# Altium PCB MBLv1.PcbDoc
Units mm, origin at the board's own origin, x right, y up, seen from the top; angles counter-clockwise.
Board outline 195 x 55 mm, 2 copper layers (Top Layer, Bottom Layer), stack 1.521 mm thick; 110 components, 72 nets, 351 pads, 167 vias.
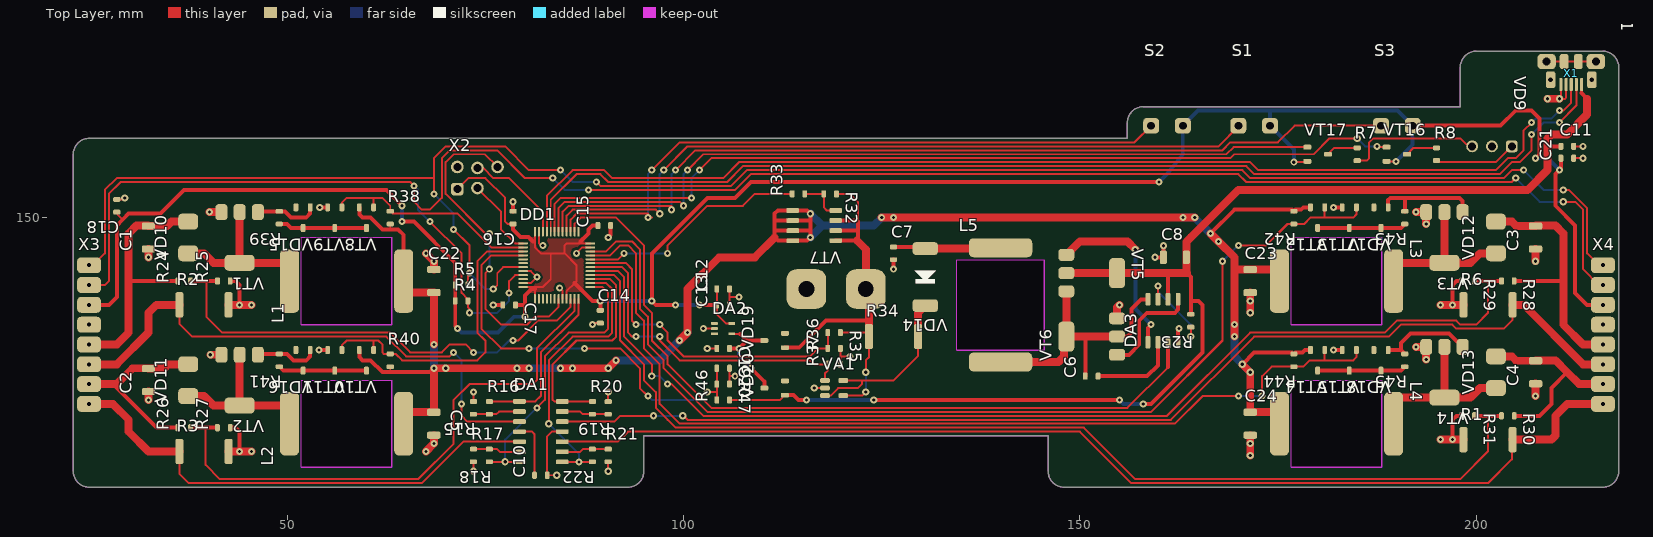
[diagram p0: Top Layer view]
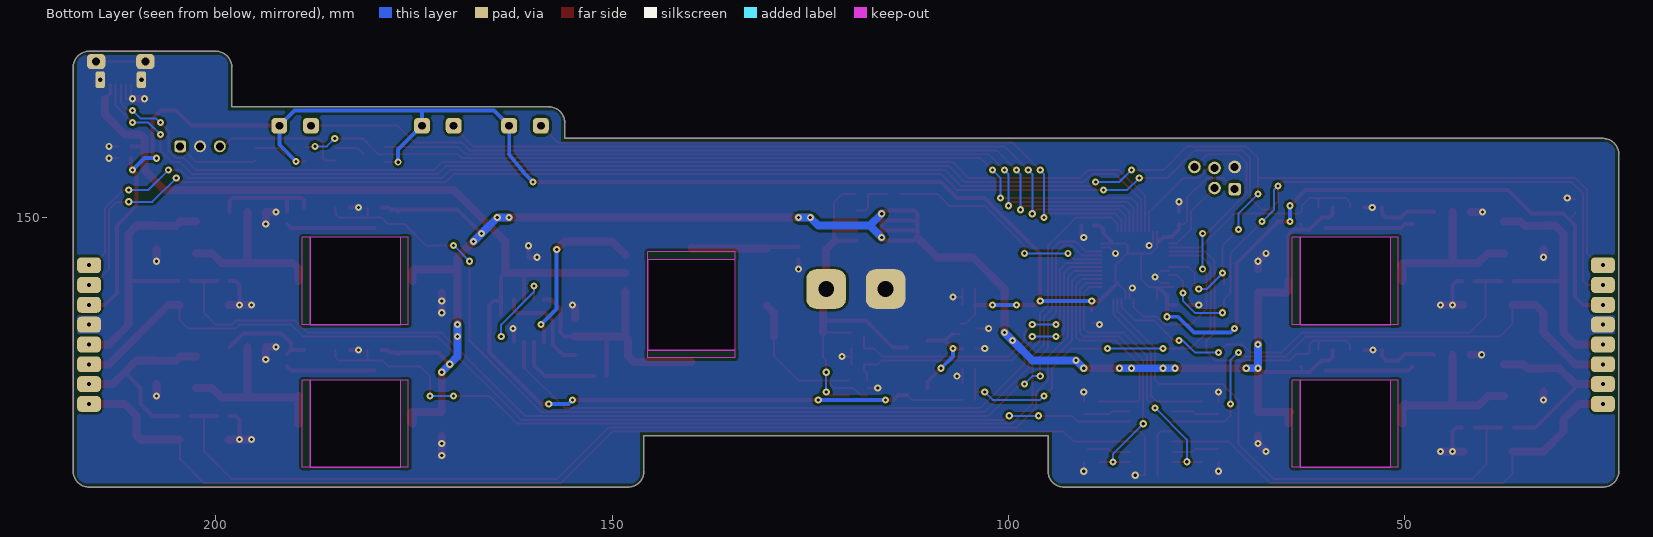
[diagram p1: Bottom Layer view, seen from below]
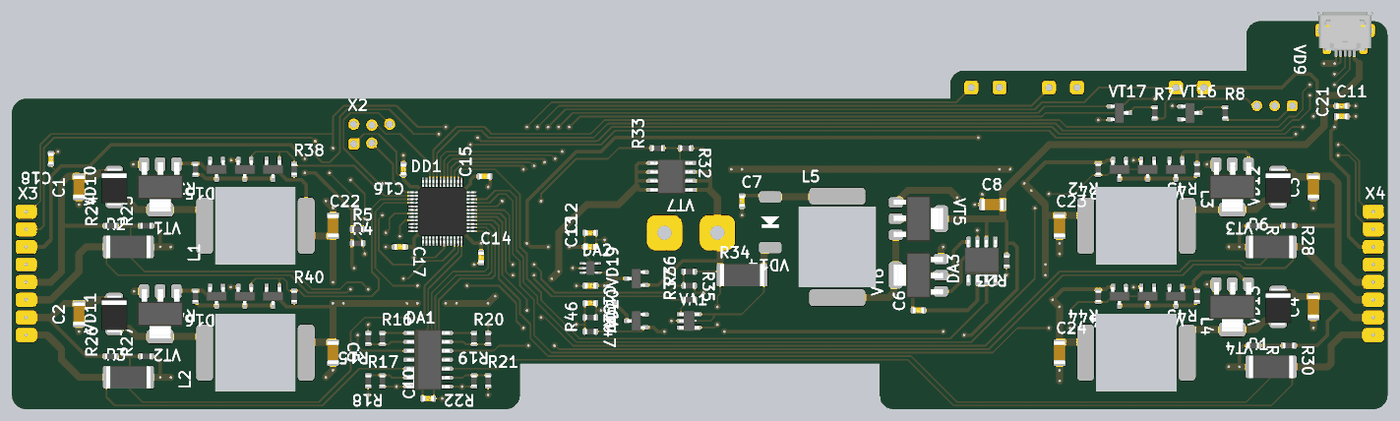
[diagram p2: 3D render of the assembled board from above, using the file's embedded part models]

## Layer stack, top to bottom
Top Solder: solder mask 0.0102, Solder Resist, Dk 3.5
Top Layer: signal copper 0.0356
Dielectric 1: dielectric 1.45, FR-4, Dk 4.8
Bottom Layer: signal copper 0.0356
Bottom Solder: solder mask 0.0102, Solder Resist, Dk 3.5

## Board outline
25,116 cw(c25,118) 23,118 23,158 cw(c25,158) 25,160 156,160 156,162 cw(c158,162) 158,164 198,164 198,169 cw(c200,169) 200,171 216,171 cw(c216,169) 218,169 218,118 cw(c216,118) 216,116 148,116 cw(c148,118) 146,118 146,122.5 95,122.5 95,118 cw(c93,118) 93,116

## Design rules (kind name [scope] priority, off if disabled: settings)
Clearance Clearance_Mid2_to_edge [OnLayer('Mid-Layer 2') vs OnLayer('Keep-Out Layer')] p1: gap=0.5
Clearance Clearance_Mid1_to_edge [OnLayer('Mid-Layer 1') vs OnLayer('Keep-Out Layer')] p2: gap=0.5
Clearance Clearance_Top_to_edge [OnLayer('Top Layer') vs OnLayer('Keep-Out Layer')] p3: gap=0.25
Clearance Clearance_Bottom_to_edge [OnLayer('Bottom Layer') vs OnLayer('Keep-Out Layer')] p4: gap=0.25
Clearance ClearancePoly [InPolygon] p5: gap=0.3
Clearance [All] p6: gap=0.25
FabricationTestPointUsage TestPointUsage [All] p1: valid=0 allowmultiple=FALSE
FabricationTestpoint Testpoint [All] p1: side=3 testpointundercomponent=TRUE minsize=1.016 maxsize=2.54 preferedsize=1.524 minholesize=0 maxholesize=1.016 preferedholesize=0.813 testpointgrid=0.025 allowsidetop=TRUE allowsidebottom=TRUE usegrid=TRUE gridtolerance=0
PolygonConnect [All] p1: connectstyle=Direct reliefconductorwidth=0.25 reliefentries=4 polygonreliefangle="45 Angle" airgapwidth=0.4
RoutingVias [All] p1: holewidth=0.5 width=1 viastyle="Through Hole" minholewidth=0.3 minwidth=0.8 maxholewidth=1 maxwidth=1.5
SilkToSolderMaskClearance SilkscreenOverComponentPads [IsPad] p1: minsilkscreentomaskgap=0.254 clearancetoexposedcopper=TRUE
SolderMaskExpansion [All] p1: expansion=0.102
Width [All] p1: maxlimit=3 minlimit=0.25 preferedwidth=0.5 minimp=50.000000 maximp=50.000000 favimp=50.000000
26 further rules are at their usual default settings.

## Components (designator, comment, footprint, x,y, rotation, side; value= is the part's Value field where it differs from the comment)
C1 "CC1206KKX7R6BB226" CAPACITORSMD1206(REFLOW) 32.5,147.5 r90 top
C2 "CC1206KKX7R6BB226" CAPACITORSMD1206(REFLOW) 32.5,129.5 r90 top
C3 "CC1206KKX7R6BB226" CAPACITORSMD1206(REFLOW) 207.5,147.5 r90 top
C4 "CC1206KKX7R6BB226" CAPACITORSMD1206(REFLOW) 207.5,130.5 r90 top
C5 "CC1206KKX7R6BB226" CAPACITORSMD1206(REFLOW) 68.5,124 r270 top
C6 "CC0603KRX7R7BB224" CAPACITORSMD0603(MANUAL) 151.5,130 r180 top
C7 "CC0603KRX7R7BB224" CAPACITORSMD0603(MANUAL) 126.5,145.5 r90 top
C8 "CC1206KKX7R6BB226" CAPACITORSMD1206(REFLOW) 162,145 r0 top
C10 "CC0603KRX7R7BB104" CAPACITORSMD0603(MANUAL) 82,117.5 r180 top
C11 "CC0603KRX7R7BB104" CAPACITORSMD0603(MANUAL) 211.5,159 r180 top
C12 "CC0603KRX7R7BB224" CAPACITORSMD0603(MANUAL) 105,141 r180 top
C13 "CC0603KRX7R7BB224" CAPACITORSMD0603(MANUAL) 105,139 r180 top
C14 "CC0603KRX7R7BB104" CAPACITORSMD0603(MANUAL) 89.5,137.5 r90 top
C15 "CC0603KRX7R7BB104" CAPACITORSMD0603(MANUAL) 90,149 r180 top
C16 "CC0603KRX7R7BB104" CAPACITORSMD0603(MANUAL) 78.5,150 r270 top
C17 "CC0603KRX7R7BB104" CAPACITORSMD0603(MANUAL) 78,139 r0 top
C18 "CC0603KRX7R7BB104" CAPACITORSMD0603(MANUAL) 28.5,151.5 r270 top
C19 "CC0603KRX7R7BB104" CAPACITORSMD0603(MANUAL) 105,133.5 r0 top
C20 "CC0603KRX7R7BB104" CAPACITORSMD0603(MANUAL) 105,131 r0 top
C21 "CC0603KRX7R7BB104" CAPACITORSMD0603(MANUAL) 211.5,157.5 r180 top
C22 "CC1206KKX7R6BB226" CAPACITORSMD1206(REFLOW) 68.5,142 r90 top
C23 "CC1206KKX7R6BB226" CAPACITORSMD1206(REFLOW) 171.5,142 r270 top
C24 "CC1206KKX7R6BB226" CAPACITORSMD1206(REFLOW) 171.5,124 r270 top
DA1 "LMV324IDR" SO14 82,123 r0 top
DA2 "TPS71533DCKR" SOT323-5 105,136 r270 top
DA3 "TPS28225D" SO8 160.5,137 r90 top
DD1 "STM32L052C6T" LQFP48_STM32 84,144 r0 top
L1 "IHLP4040DZER101M" IHLP-4040DZ(manual/deep1.5mm) 57.5,142 r180 top
L2 "IHLP4040DZER101M" IHLP-4040DZ(manual/deep1.5mm) 57.5,124 r180 top
L3 "IHLP4040DZER101M" IHLP-4040DZ(manual/deep1.5mm) 182.4,142 r0 top
L4 "IHLP4040DZER101M" IHLP-4040DZ(manual/deep1.5mm) 182.4,124 r0 top
L5 "IHLP4040DZER101M" IHLP-4040DZ(manual/deep1.5mm) 140,139 r90 top
R1 "CRA2512-FZ-R100ELF" RESISTORSMD2512(REFLOW) 201.5,122 r0 top
R2 "CRA2512-FZ-R100ELF" RESISTORSMD2512(REFLOW) 39.5,139 r180 top
R3 "CRA2512-FZ-R100ELF" RESISTORSMD2512(REFLOW) 39.5,120.5 r180 top
R4 "RC0603FR-074K7" RESISTORSMD0603(MANUAL) 72,139.5 r0 top
R5 "RC0603FR-074K7" RESISTORSMD0603(MANUAL) 72,141.5 r0 top
R6 "CRA2512-FZ-R100ELF" RESISTORSMD2512(REFLOW) 201.5,139 r0 top
R7 "RC0603FR-07100R" RESISTORSMD0603(MANUAL) 185,158 r270 top
R8 "RC0603FR-07100R" RESISTORSMD0603(MANUAL) 195,158 r270 top
R15 "RC0603FR-074K7" RESISTORSMD0603(MANUAL) 73.5,126 r270 top
R16 "RC0603FR-07220K" RESISTORSMD0603(MANUAL) 75.5,126 r90 top
R17 "RC0603FR-074K7" RESISTORSMD0603(MANUAL) 73.5,120 r90 top
R18 "RC0603FR-07220K" RESISTORSMD0603(MANUAL) 75.5,120 r270 top
R19 "RC0603FR-074K7" RESISTORSMD0603(MANUAL) 90.5,126 r270 top
R20 "RC0603FR-07220K" RESISTORSMD0603(MANUAL) 88.5,126 r90 top
R21 "RC0603FR-074K7" RESISTORSMD0603(MANUAL) 90.5,120 r90 top
R22 "RC0603FR-07220K" RESISTORSMD0603(MANUAL) 88.5,120 r270 top
R23 "RC0603FR-07220K" RESISTORSMD0603(MANUAL) 164,137 r270 top
R24 "RC0603FR-07470K" RESISTORSMD0603(MANUAL) 37,142 r180 top
R25 "RC0603FR-07100K" RESISTORSMD0603(MANUAL) 42,142 r180 top
R26 "RC0603FR-07470K" RESISTORSMD0603(MANUAL) 37,123.5 r180 top
R27 "RC0603FR-07100K" RESISTORSMD0603(MANUAL) 42,123.5 r180 top
R28 "RC0603FR-07470K" RESISTORSMD0603(MANUAL) 204,142 r0 top
R29 "RC0603FR-07100K" RESISTORSMD0603(MANUAL) 199,142 r0 top
R30 "RC0603FR-07470K" RESISTORSMD0603(MANUAL) 204,125 r0 top
R31 "RC0603FR-07100K" RESISTORSMD0603(MANUAL) 199,125 r0 top
R32 "RC0603FR-07100K" RESISTORSMD0603(MANUAL) 118.5,153 r0 top
R33 "RC0603FR-074K7" RESISTORSMD0603(MANUAL) 114.5,153 r180 top
R34 "CRA2512-FZ-R010ELF" RESISTORSMD2512(REFLOW) 126.5,135 r0 top
R35 "RC0603FR-07220K" RESISTORSMD0603(MANUAL) 119,135.5 r0 top
R36 "RC0603FR-07220K" RESISTORSMD0603(MANUAL) 119,133.5 r180 top
R37 "RC0603FR-07470K" RESISTORSMD0603(MANUAL) 119,131.5 r180 top
R38 "RC0603FR-0747K" RESISTORSMD0603(MANUAL) 63,150 r90 top
R39 "RC0603FR-075R1" RESISTORSMD0603(MANUAL) 49,150 r270 top
R40 "RC0603FR-0747K" RESISTORSMD0603(MANUAL) 63,132 r90 top
R41 "RC0603FR-075R1" RESISTORSMD0603(MANUAL) 49,132 r270 top
R42 "RC0603FR-0747K" RESISTORSMD0603(MANUAL) 177,150 r270 top
R43 "RC0603FR-075R1" RESISTORSMD0603(MANUAL) 191,150 r270 top
R44 "RC0603FR-0747K" RESISTORSMD0603(MANUAL) 177,132 r270 top
R45 "RC0603FR-075R1" RESISTORSMD0603(MANUAL) 191,132 r270 top
R46 "RC0603FR-07220K" RESISTORSMD0603(MANUAL) 105,127 r180 top
R47 "RC0603FR-07100K" RESISTORSMD0603(MANUAL) 105,129 r0 top
S1 "TC-3121" "TC-3121(RIGHT-ANGLE VAR1)" 172,164.6 r90 top
S2 "TC-3121" "TC-3121(RIGHT-ANGLE VAR1)" 161,164.6 r90 top
S3 "TC-3121" "TC-3121(RIGHT-ANGLE VAR1)" 190,164.6 r90 top
VA1 "INA138NA" SOT23-5 119,128.5 r0 top
VD9 "L-119EGWT" L-119EGWT(rightAngleVar1) 202,166 r270 top
VD10 "10BQ040" SMB_10BQ40 37.5,147.5 r90 top
VD11 "10BQ040" SMB_10BQ40 37.5,129.5 r90 top
VD12 "10BQ040" SMB_10BQ40 202.5,147.5 r90 top
VD13 "10BQ040" SMB_10BQ40 202.5,130.5 r90 top
VD14 "30BQ040" SMC 130.5,142.5 r270 top
VD15 "BAT54" SOT23 52,150 r180 top
VD16 "BAT54" SOT23 52,132 r180 top
VD17 "BAT54" SOT23 188,150 r180 top
VD18 "BAT54" SOT23 188,132 r180 top
VD19 "BAT54" SOT23 111.5,134.5 r90 top
VD20 "BAT54" SOT23 111.5,128.5 r90 top
VT1 "IRLL2705" SOT223 44,147.5 r180 top
VT2 "IRLL2705" SOT223 44,129.5 r180 top
VT3 "IRLL2705" SOT223 196,147.5 r180 top
VT4 "IRLL2705" SOT223 196,130.5 r180 top
VT5 "IRLL2705" SOT223 151.5,143 r270 top
VT6 "IRLL2705" SOT223 151.5,135 r90 top
VT7 "IRF7410" SO8 116.5,149 r180 top
VT8 "IRLML6402" SOT23 60,150 r180 top
VT9 "IRLML2402" SOT23 56,150 r180 top
VT10 "IRLML6402" SOT23 60,132 r180 top
VT11 "IRLML2402" SOT23 56,132 r180 top
VT12 "IRLML6402" SOT23 180,150 r180 top
VT13 "IRLML2402" SOT23 184,150 r180 top
VT14 "IRLML6402" SOT23 180,132 r180 top
VT15 "IRLML2402" SOT23 184,132 r180 top
VT16 "PDTA143ET" SOT23 190,158 r270 top
VT17 "PDTA143ET" SOT23 180,158 r270 top
X1 "MOLEX 47346-0001" "MOLEX 47346-0001" 212,166.8 r270 top
X2 "PLD-6-SWD" PLD-6-SWD 74,155 r0 top
X3 "ConnectorMainSide" ConnectorMainSide 25,144 r0 top
X4 "ConnectorMainSide" ConnectorMainSide 216,144 r0 top

## Footprints (in the part's own frame and the unit in brackets; to place one, negate y for a bottom-side part, rotate by r counter-clockwise, add the part's x,y. Pads: shape width x height; smd on the part's side, far side on the other; paste and mask are expansions set on the pad)
CAPACITORSMD0603(MANUAL) [mm]
  rrect50% 0.6x0.9 smd: 1(-0.8,0) 2(0.8,0)
  body extent -0.8,-0.4 0.8,0.4, height 0.3
CAPACITORSMD1206(REFLOW) [mm]
  rrect50% 0.9x1.7 smd: 1(-1.45,0) 2(1.45,0)
  body extent -1.6,-0.8 1.6,0.8, height 1
ConnectorMainSide [mm]
  rrect50% 3x2 hole 0.5: 1(0,0) 2(0,-2.5) 3(0,-5) 4(0,-7.5) 5(0,-10) 6(0,-12.5) 7(0,-15) 8(0,-17.5)
IHLP-4040DZ(manual/deep1.5mm) [mm]
  rrect50% 2.4x8 smd: 1(-7.2,0) 2(7.2,0)
  Bottom Layer keep-out lines w0.1: 6.7,5.5 5.7,5.5 5.7,-5.5 6.7,-5.5 6.7,5.5 ; -5.7,5.5 -5.7,-5.5 -6.7,-5.5 -6.7,5.5 -5.7,5.5
  Keep-Out Layer board cut-out: -5.7,5.5 5.7,5.5 5.7,-5.5 -5.7,-5.5
  Keep-Out Layer lines w0.1: 5.7,5.5 5.7,-5.5 -5.7,-5.5 -5.7,5.5 5.7,5.5
  body extent -5.7,-5.2 5.7,5.2, height 2.5
L-119EGWT(rightAngleVar1) [mm]
  rrect50% 1.5x1.5 hole 1: 1(7,2.5)
  round 1.5 hole 1: 2(7,0) 3(7,-2.5)
  body extent -7,-2.75 7.25,2.75, height 2
LQFP48_STM32 [mm]
  rrect50% 0.25x1.2 smd: 1(-2.75,-4.25) 2(-2.25,-4.25) 3(-1.75,-4.25) 4(-1.25,-4.25) 5(-0.75,-4.25) 6(-0.25,-4.25) 7(0.25,-4.25) 8(0.75,-4.25) 9(1.25,-4.25) 10(1.75,-4.25) 11(2.25,-4.25) 12(2.75,-4.25) 25(2.75,4.25) 26(2.25,4.25) 27(1.75,4.25) 28(1.25,4.25) 29(0.75,4.25) 30(0.25,4.25) 31(-0.25,4.25) 32(-0.75,4.25) 33(-1.25,4.25) 34(-1.75,4.25) 35(-2.25,4.25) 36(-2.75,4.25)
  rrect50% 1.2x0.25 smd: 13(4.25,-2.75) 14(4.25,-2.25) 15(4.25,-1.75) 16(4.25,-1.25) 17(4.25,-0.75) 18(4.25,-0.25) 19(4.25,0.25) 20(4.25,0.75) 21(4.25,1.25) 22(4.25,1.75) 23(4.25,2.25) 24(4.25,2.75) 37(-4.25,2.75) 38(-4.25,2.25) 39(-4.25,1.75) 40(-4.25,1.25) 41(-4.25,0.75) 42(-4.25,0.25) 43(-4.25,-0.25) 44(-4.25,-0.75) 45(-4.25,-1.25) 46(-4.25,-1.75) 47(-4.25,-2.25) 48(-4.25,-2.75)
  body extent -4.5,-4.5 4.5,4.5, height 1.6
"MOLEX 47346-0001" [mm]
  rrect50% 1.6x0.4 smd: 1(0,1.3) 2(0,0.65) 3(0,0) 4(0,-0.65) 5(0,-1.3)
  rrect50% 1.9x2.3 hole 1: 6(-2.9,3.1) 6(-2.9,-3.1)
  rrect50% 1.9x1.1 smd: 6(-2.9,-0.9) 6(-2.9,0.9)
  rrect50% 2.1x1.2 hole 0.6: 6(-0.6,2.6) 6(-0.6,-2.6)
  body extent -5.48,-3.99 -0.05,3.99, height 2.77
PLD-6-SWD [mm]
  rrect50% 1.6x1.6 hole 1: 1(-2.54,-1.397)
  round 1.6 hole 1: 2(-2.54,1.397) 3(0,-1.27) 4(0,1.27) 6(2.54,1.397)
RESISTORSMD0603(MANUAL) [mm]
  rrect50% 0.6x0.9 smd: 1(-0.8,0) 2(0.8,0)
  body extent -0.8,-0.4 0.8,0.4, height 0.5
RESISTORSMD2512(REFLOW) [mm]
  rrect50% 1x3.2 smd: 1(-3.1,0) 2(3.1,0)
  body extent -3.15,-1.6 3.15,1.6, height 0.65
SMB_10BQ40 [mm]
  rrect50% 2x2.5 smd: 1(-2,0) 2(2,0)
  body extent -2.65,-1.85 2.65,1.85, height 2.2
SMC [mm]
  rrect50% 1.6x3.2 smd: 1(-3.6,0) 2(3.6,0)
  silkscreen extent -0.8,-1.3 0.8,1.3, body extent -4,-3 4,3, height 2.7
SO8 [mm]
  rrect50% 1.6x0.6 smd: 1(-2.7,1.905) 2(-2.7,0.635) 3(-2.7,-0.635) 4(-2.7,-1.905) 5(2.7,-1.905) 6(2.7,-0.635) 7(2.7,0.635) 8(2.7,1.905)
  body extent -3,-2.45 3,2.45, height 1.63
SO14 [mm]
  rrect50% 1.6x0.6 smd: 1(-2.7,3.81) 2(-2.7,2.54) 3(-2.7,1.27) 4(-2.7,0) 5(-2.7,-1.27) 6(-2.7,-2.54) 7(-2.7,-3.81) 8(2.7,-3.81) 9(2.7,-2.54) 10(2.7,-1.27) 11(2.7,0) 12(2.7,1.27) 13(2.7,2.54) 14(2.7,3.81)
  body extent -3.01,-4.32 3.01,4.33, height 1.75
SOT23 [mm]
  rrect50% 0.6x1 smd: 1(-0.9,-1.3) 2(0.9,-1.3) 3(0,1.3)
  body extent -1.46,-1.26 1.46,1.26, height 0.97
SOT23-5 [mm]
  rrect50% 1.2x0.6 smd: 1(-1.15,0.95) 2(-1.15,0) 3(-1.15,-0.95) 4(1.15,-0.95) 5(1.15,0.95)
  body extent -1.4,-1.45 1.4,1.45, height 1.2
SOT223 [mm]
  rrect50% 1.5x2 smd: 1(-2.3,-3.2) 2(0,-3.2) 3(2.3,-3.2)
  rrect50% 3.8x2 smd: 2(0,3.2)
  body extent -3.25,-3.5 3.25,3.5, height 1.68
SOT323-5 [mm]
  rrect50% 0.35x0.85 smd: 1(-0.65,-1.1) 2(0,-1.1) 3(0.65,-1.1) 4(0.65,1.1) 5(-0.65,1.1)
  body extent -1,-1.05 1,1.05, height 1
"TC-3121(RIGHT-ANGLE VAR1)" [mm]
  rrect50% 2x2 hole 1: 1(-3,2) 2(-3,-2)
  body extent -3,-3 5,3, height 3.5

## Part data
C1 C2 C3 C4 C5 C8 C22 C23 C24: library part CapacitorSMD1206(reflow), "CAPACITOR Capacitor SMD 1206 3.2x1.6mm"
C6 C7 C10 C11 C12 C13 C14 C15 C16 C17 C18 C19 C20 C21: library part CapacitorSMD0603(reflow), "CAPACITOR Capacitor SMD 0603 1.6x0.8mm"
DA1: library part OpAmp_Quad_SO14, "IC generic quad op amp SO14"
DA2: library part TPS715__DCKR, "IC LDO"
DA3: "IC Synchronous MOSFET drivers"
DD1: library part STM32L052C_T, "IC UC/UP"
L1 L2 L3 L4 L5: library part IHLP-4040DZ, "MAGNETIC Inductor SMD 4040 h=4mm"
R1 R2 R3 R6 R34: library part ResistorSMD2512(reflow), "RESISTOR Resistor SMD 2512 6.35x3.2mm"
R4 R5 R7 R8 R15 R16 R17 R18 R19 R20 R21 R22 R23 R24 R25 R26 R27 R28 R29 R30 R31 R32 R33 R35 R36 R37 R38 R39 R40 R41 R42 R43 R44 R45 R46 R47: library part ResistorSMD0603(reflow), "RESISTOR Resistor SMD 0603 1.6x0.8mm"
S1 S2 S3: "SWITCH Button"
VA1: "IC High-Side Current Shunt Monitor 2.7...36V"
VD9: "Right-angle red/green LED"
VD10 VD11 VD12 VD13: library part 10BQ___, "DIODE Schottky rectifier"
VD14: library part 30BQ___, "DIODE Schottky rectifier"
VD15 VD16 VD17 VD18 VD19 VD20: "DIODE Schottky barrier diodes"
VT1 VT2 VT3 VT4 VT5 VT6: library part MOSFET_N_SOT223, "TRANSISTOR MOSFET N generic sot23"
VT7: library part MOSFET_P_SO8, "TRANSISTOR MOSFET P generic SO8"
VT8 VT10 VT12 VT14: library part MOSFET_P_sot23, "TRANSISTOR MOSFET P generic sot23"
VT9 VT11 VT13 VT15: library part MOSFET_N_sot23, "TRANSISTOR MOSFET N generic sot23"
VT16 VT17: "TRANSISTOR PNP resistors-equipped transistor sot23"
X1: "CONNECTOR USB micro B"
X2: "CONNECTOR PROGRAM 6-pin SWD connector"

## Free pads (board coordinates)
  rrect50% 5x5 hole 2: 0(115.5,141) 1(123,141)

## Via types
v1: diameter 0.9, hole 0.4, Top Layer to Bottom Layer, tented both sides, 167 vias

## Nets (pads, with @x,y where several pads share a name; then routed paths per layer and width w, separated by ;. In a path a pad name is that pad's centre, name@x,y a point inside that pad or via, vN(x,y) a via of type N, cw(c..) or ccw(c..) an arc to the next point about the centre after c; other vN are vias at no path point)
+3.3V: C12.2 C13.2 C14.2 C15.2 C16.2 C17.2 C18.2 C21.2 DA2.5 DD1.1 DD1.9 DD1.24 DD1.36 DD1.48 R4.1 R5.1 S1.2 S2.2 S3.2 VT16.2 VT17.2 X2.1 X3.3 X4.3 | length 335.5
  Top Layer w0.25: C18.2 28.5,150.5 29.25,149.75 ; X2.1 72.857,155 75,155 77.5,152.5 77.5,149.5 77.8,149.2 C16.2 ; DD1.48@79.25,141.25 DD1.48 81.25,141.25 ; DD1.1 81.25,141 81.25,141.25 ; DD1.36 81.25,146.25 82,145.5 83.25,145.5 ; DD1.9 85.25,140.75 86.25,141.75 86.5,142 86.5,144 85,145.5 ; DD1.24 85.25,146.75 85,146.5 85,145.5 ; C13.2 C12.2 ; C13.2 104.2,137.8 105.35,136.65 DA2.5 ; v1(177,157) 178.6,157 VT17.2 ; VT16.2 v1(189.9,157.1) ; 81.25,141.25 82.25,141.25 83.25,142.25 83.25,145.5 ; 83.25,145.5 85,145.5
  Top Layer w0.5: X3.3 27.5,139 28.5,140 28.5,149 29.25,149.75 30,150.5 34,150.5 37,153.5 62.5,153.5 v1(64.5,151.5) ; v1(64.5,149.5) 66,149.5 71.2,144.3 R5.1 R4.1 71.2,136.3 v1(71.5,136) ; C16.2 78.5,148.5 79.45,147.55 80.45,147.55 81,147 ; C17.2 80,139 ; v1(80,137.5) 80,139 ; 81.25,141 80.82,141 80,140.18 80,139 ; 86.25,141.75 88.5,139.5 v1(89.5,139.5) C14.2 ; 87,147 88,148 88,148.5 88.5,149 C15.2 ; v1(99,139) 96.5,139 v1(96,139.5) 96,145.5 103,152.5 106.5,152.5 108.5,154.5 v1(160,154.5) ; v1(102,139) C13.2 ; S3.2 203.1,161.6 205,163.5 207,163.5 208,162.5 208,158 v1(207.5,157.5) ; C21.2 210.7,156.2 v1(210.5,156) 210,155.5 210,151.5 212.5,149 212.5,140.5 214,139 X4.3
  Bottom Layer w0.45: 163,158 S2.2
  Bottom Layer w0.5: v1(64.5,149.5) v1(64.5,151.5) ; v1(71.5,136) 72,135.5 76.6,135.5 78.6,137.5 v1(80,137.5) ; v1(89.5,139.5) v1(96,139.5) ; v1(99,139) v1(102,139) ; v1(160,154.5) 161,155.5 163,158 ; S2.2 164.9,163.5 174,163.5 ; v1(177,157) 177,158.6 S1.2 174,163.5 ; v1(189.9,157.1) 192,159.2 S3.2 190.1,163.5 174,163.5 ; v1(207.5,157.5) 209,157.5 v1(210.5,156)
+5VUSB: C8.2 C11.2 DA3.6 R23.1 R46.1 VD20.1 VT5.2 X1.1 | length 163.7
  Top Layer w0.25: R46.1 112.2,127 VD20.1 ; 163.45,143.05 163.5,143
  Top Layer w0.4: 213.3,165.7 X1.1
  Top Layer w0.5: VD20.1 113.9,127.6 114.5,127 v1(115.5,127) ; v1(124,127) v1(155,127) ; v1(158,126.5) 159,126.5 165.5,133 165.5,139 165,139.5 164,139.5 ; DA3.6 161.135,142.865 ; 163.5,143 164,142.5 164,139.5 ; R23.1 164,139.5 ; 209.15,159 C11.2 ; 213.3,165.7 214,165
  Top Layer w1: VT5.2@148.3,143 154.7,143 163.5,143 ; 163.45,143.05 C8.2 163.45,146.95 164.05,147.55 170,153.5 206.5,153.5 209,156 209,160 209.5,160.5 211.5,160.5 214,163 214,165
  Bottom Layer w0.5: v1(115.5,127) v1(124,127) ; v1(155,127) 155.5,126.5 v1(158,126.5)
BAT: pad.1 R32.2 R34.1 R35.2 VA1.4 VD19.1 VT7.1 VT7.2 VT7.3 | length 54.9
  Top Layer w0.25: R32.2 121,153 122,152 122,149.77 121.865,149.635 ; R35.2 123.4,135.5 123.4,132.4 123,132 v1(123,130.5) ; VA1.4 122.55,127.55 v1(123,128)
  Top Layer w0.5: VD19.1 114.6,133.6 118,137 123.4,137 ; VT7.1 121.905,147.095 122,147.19 122,148.5 ; VT7.2 121.865,148.365 122,148.5 ; VT7.3 121.865,149.635 122,149.5 122,148.5 ; pad.1 pad.1@123.4,140.6
  Top Layer w1: 121.905,147.095 123,146 pad.1 ; R34.1@123.4,135.5 123.4,137 pad.1@123.4,140.6
  Bottom Layer w0.25: v1(123,128) v1(123,130.5)
BTNCTRL: DD1.29 S3.1 | length 113.6
  Top Layer w0.25: DD1.29 84.75,150.75 85.5,151.5 98.5,151.5 v1(98.5,151) ; v1(99,156) 101.5,158.5 168,158.5 169,159.5 175,159.5 177.1,161.6 S3.1
  Bottom Layer w0.25: v1(98.5,151) 98.5,155.5 v1(99,156)
BTNMINUS: DD1.27 S2.1 | length 84.3
  Top Layer w0.25: DD1.27 85.75,149.75 86.5,150.5 95.5,150.5 96,150 v1(95.5,150) ; v1(96,156) 99.5,159.5 156.9,159.5 S2.1
  Bottom Layer w0.25: v1(95.5,150) 95.5,155.5 v1(96,156)
BTNPLUS: DD1.28 S1.1 | length 94.9
  Top Layer w0.25: DD1.28 85.25,150.25 86,151 96.5,151 v1(97,150.5) ; v1(97.5,156) 100.5,159 167.5,159 170,161.5 S1.1
  Bottom Layer w0.25: v1(97,150.5) 97,155.5 v1(97.5,156)
CHARGEBUCK1: C6.2 DA3.8 L5.1 VT5.3 VT6.2 | length 35.7
  Top Layer w0.5: VT6.2@148,134.7 VT6.2@148.3,135 ; 150.5,135 150.7,134.8 C6.2 ; VT6.2@154.7,135 156,135 156.5,135.5 156.5,138.5 157.7,139.7 DA3.8
  Top Layer w1: L5.1 147.3,131.8 148,132.5 VT6.2@148,134.7 ; VT5.3 148.3,135 150.5,135 VT6.2@154.7,135
CHARGEBUCK2: C7.2 L5.2 VD14.1 | length 13.6
  Top Layer w0.5: C7.2 130.3,146.3 VD14.1
  Top Layer w1: VD14.1 139.9,146.1 L5.2
CHARGEBUCK3: R34.2 VA1.3 VA1.5 VD14.2 | length 23.1
  Top Layer w0.25: VA1.3 118.55,127.55 119.5,128.5 122,128.5 122.5,129 122.5,129.45 ; VA1.5 122.5,129.45 ; R34.2 129.6,132.6 126.45,129.45 122.5,129.45
  Top Layer w1: R34.2 129.6,138 VD14.2
CHARGELGATE: DA3.5 VT6.1 | length 13.1
  Top Layer w0.5: VT6.1 156.2,132.7 157.5,134 157.5,137 158.5,138 162,138 162.405,138.405 DA3.5
CHARGEUGATE: DA3.1 VT5.1 | length 22.5
  Top Layer w0.5: DA3.1 158.595,136.095 v1(159,136.5)
  Top Layer w1: VT5.1 150,147 156,147 v1(157,146)
  Bottom Layer w0.5: v1(157,146) 157,138.5 v1(159,136.5)
GATELEFT1: R39.1 VD15.1 VT1.1 | length 8
  Top Layer w0.5: VT1.1 46.4,150.8 R39.1 49.7,150.8 50.5,150 52.4,150 52.9,150.5 VD15.1
GATELEFT2: R41.1 VD16.1 VT2.1 | length 8
  Top Layer w0.5: VT2.1 46.4,132.8 R41.1 50,132.8 50.8,132 52.4,132 52.9,132.5 VD16.1
GATERIGHT1: R43.1 VD17.1 VT3.1 | length 13.7
  Top Layer w0.5: VD17.1 188.9,152.2 189.2,152.5 197.9,152.5 198.3,152.1 VT3.1 ; R43.1 191,152.5
GATERIGHT2: R45.1 VD18.1 VT4.1 | length 12.2
  Top Layer w0.5: VD18.1 190.5,133.3 ; R45.1 190.5,133.3 ; VT4.1 196.6,135.4 191.7,135.4 190.5,134.2 190.5,133.3
GND: C1.1 C2.1 C3.1 C4.1 C5.2 C7.1 C8.1 C10.1 C11.1 C12.1 C13.1 C14.1 C15.1 C16.1 C17.1 C18.1 C19.1 C20.2 C21.1 C22.2 C23.2 C24.2 DA1.11 DA2.2 DA3.4 DD1.8 DD1.23 DD1.35 DD1.44 DD1.47 pad.0 R1.1 R2.1 R3.1 R6.1 R15.1 R17.1 R19.1 R21.1 R25.1 R27.1 R29.1 R31.1 R36.1 R37.1 R47.2 VA1.2 VD9.2 VT1.3 VT2.3 VT3.3 VT4.3 VT6.3 VT9.2 VT11.2 VT13.2 VT15.2 X1.4 X1.5 X1.6 X2.2 X3.4 X4.4 | length 119
  Top Layer w0.25: C18.1 29.3,152.3 v1(29.5,152.5) ; v1(73.5,118) R17.1 ; R15.1 v1(73.5,128) ; DD1.47 80.75,141.75 v1(81.5,142.5) 80.75,143.25 DD1.44 ; DD1.35 81.75,146.75 82,146.5 v1(82.25,146.5) ; v1(84,117.5) C10.1 82.8,122.4 83.4,123 DA1.11 ; v1(84.375,141.125) 84.75,140.75 DD1.8 ; v1(86.5,145.5) 87.25,146.25 DD1.23 ; v1(88.5,136.5) 88.7,136.7 C14.1 ; v1(90.5,118) R21.1 ; R19.1 v1(90.5,128) ; v1(102.5,136) DA2.2 ; v1(103,133.5) C19.1 ; R47.2 105.8,130 ; C20.2 105.8,130 ; C13.1 105.8,140 ; C12.1 105.8,140 ; v1(106.5,130) 105.8,130 ; v1(107,140) 105.8,140 ; v1(116.5,128.5) VA1.2 ; R37.1 119.8,132.5 ; R36.1 119.8,132.5 ; v1(121,132.5) 119.8,132.5 ; X1.6@208.9,169.7 211.1,169.7 212.9,169.7 X1.6@215.1,169.7 ; v1(210.5,165) 211.2,165 211.35,165.15 X1.4 ; v1@210.7,165.2 X1.5 ; C21.1 v1(213.5,157.5) ; C11.1 v1(213.5,159)
  Top Layer w0.5: R27.1 43.5,123.5 44,123 v1(44,120.5) ; R25.1 43.5,142 44,141.5 v1(44,139) ; v1(54,133.3) VT11.2 ; v1(54.1,151.3) VT9.2 ; v1(76,139) 76.5,139 C17.1 ; C16.1 v1(78.5,152) ; v1(90.5,147.5) 90.8,147.8 C15.1 ; v1(126.5,143.5) C7.1 ; v1(159.5,145) C8.1 v1(160.55,146.45) ; DA3.4 162.405,135.905 v1(162.5,136) ; v1(182,133.3) VT15.2 ; v1(182,151.3) VT13.2 ; v1(197,122) 197,124.5 197.5,125 R31.1 ; v1(197,139) 197,141.5 197.5,142 R29.1
  Top Layer w1: v1(32.5,127) C2.1 ; v1(32.5,145) C1.1 ; v1(40.2,150.7) VT1.3 ; v1(40.3,132.7) VT2.3 ; R3.1 v1(44,120.5) v1(45.5,120.5) ; R2.1 v1(44,139) v1(45.5,139) ; v1(67.5,120.5) v1(68.5,121.5) C5.2 ; v1(67.5,145.5) v1(68.5,144.5) C22.2 ; VT6.3 154.7,138.7 v1(155,139) ; v1(171.5,120) v1(171.5,121.5) C24.2 ; v1(171.5,138) v1(171.5,139.5) C23.2 ; v1(192.4,133.7) VT4.3 v1(193.7,132.1) ; v1(192.4,150.7) VT3.3 v1(193.7,149.2) ; v1(195.5,122) v1(197,122) R1.1 ; v1(195.5,139) v1(197,139) R6.1 ; v1(207.5,127.5) C4.1 ; v1(207.5,144.5) C3.1 ; v1(209,165) v1(210.5,165)
ICHARGE: DD1.18 R37.2 VA1.1 | length 41.9
  Top Layer w0.25: DD1.18 92.25,143.75 93,143 93,135.5 93.5,135 v1(94,135) ; v1(97,135) 97,134.5 99.5,132 116,132 116.5,131.5 R37.2 118.2,130.7 117.85,130.35 VA1.1
  Bottom Layer w0.25: v1(94,135) v1(97,135)
ILEFT1: DA1.1 DD1.12 R16.2 | length 21
  Top Layer w0.25: R16.2 75.51,126.81 DA1.1 81.31,126.81 82,127.5 82,133 86.75,137.75 DD1.12
ILEFT2: DA1.7 DD1.13 R18.2 | length 35.7
  Top Layer w0.25: R18.2 v1(77.5,119.2) 79.29,119.2 DA1.7 ; v1(81.5,126) 82.5,127 82.5,132.5 85.5,135.5 90,135.5 90.5,136 90.5,140.5 89.75,141.25 DD1.13
  Bottom Layer w0.25: v1(77.5,119.2) 77.5,122 v1(81.5,126)
IRIGHT1: DA1.14 DD1.15 R20.2 | length 29.1
  Top Layer w0.25: DD1.15 90.75,142.25 91.5,141.5 91.5,135 91,134.5 86.5,134.5 83.5,131.5 83.5,127 83.69,126.81 DA1.14 88.49,126.81 R20.2
IRIGHT2: DA1.8 DD1.14 R22.2 | length 36.2
  Top Layer w0.25: v1(83,124) 83,132 86,135 90.5,135 91,135.5 91,141 90.25,141.75 DD1.14 ; DA1.8 v1(86.81,119.19) R22.2@88.49,119.19
  Bottom Layer w0.25: v1(83,124) 86.81,120.19 v1(86.81,119.19)
LEDGREEN: R7.2 VD9.3 | length 17.2
  Top Layer w0.25: R7.2 186.2,157.2 186.5,157.5 186.5,159.5 187,160 198,160 199,159 VD9.3
LEDGREENMCU: DD1.30 VT17.1 | length 103.4
  Top Layer w0.25: DD1.30 84.25,151.25 85,152 99.5,152 v1(100,151.5) ; v1(100.5,156) 102.5,158 168.5,158 169.4,158.9 VT17.1
  Bottom Layer w0.25: v1(100,151.5) 100,155.5 v1(100.5,156)
LEDRED: R8.2 VD9.1 | length 10.4
  Top Layer w0.25: R8.2 195.2,157 202.5,157 VD9.1
LEDREDMCU: DD1.31 VT16.1 | length 113.8
  Top Layer w0.25: DD1.31 83.75,151.75 84.5,152.5 v1(101,152.5) ; v1(102,156) 103.5,157.5 169,157.5 169.5,158 179.5,158 181.5,160 v1(185,160) ; v1(187.5,159) 187.6,158.9 VT16.1
  Bottom Layer w0.25: v1(101,152.5) 101,155 v1(102,156) ; v1(185,160) 186,159 v1(187.5,159)
LIGHTON: DD1.20 R33.2 | length 29.5
  Top Layer w0.25: DD1.20 91.75,144.75 v1(92.5,145.5) ; v1(98,145.5) 98,146.5 103,151.5 107.5,151.5 109,153 R33.2
  Bottom Layer w0.25: v1(92.5,145.5) v1(98,145.5)
LIGHTPOWER: C5.1 C22.1 C23.1 C24.1 L1.1 L2.1 L3.1 L4.1 R38.1 R40.1 R42.1 R44.1 VT7.5 VT7.6 VT7.7 VT7.8 VT8.2 VT10.2 VT12.2 VT14.2 | length 261.9
  Top Layer w0.25: 63,130.5 R40.1 R40.1@63.3,131.2 ; 63,148.5 R38.1 R38.1@63.3,149.2
  Top Layer w0.5: VT10.2 59.1,132.4 59.5,132 60.5,132 62,130.5 63,130.5 68,130.5 v1(68.5,131) ; VT8.2 59.1,150.4 59.5,150 60.5,150 62,148.5 63,148.5 64,148.5 64.7,147.8 L1.1 ; v1(166.5,148) 169.5,151 176.8,151 R42.1 177.2,151 177.9,151 178.2,151.3 VT12.2 ; v1(170.5,131.5) 172,133 176.8,133 R44.1 177.2,133 178.1,133 178.4,133.3 VT14.2 ; 111.5,148.5 111.5,149.5 ; 111.5,148.5 111.5,147.5 111.905,147.095 VT7.8 115.595,147.095 v1(116,147.5) 116,148.5 ; 111.5,148.5 111.635,148.365 VT7.7 115.865,148.365 116,148.5 ; 111.5,149.5 111.5,150.5 111.905,150.905 VT7.5 115.595,150.905 v1(116,150.5) 116,149.5 ; 111.5,149.5 111.635,149.635 VT7.6 115.865,149.635 116,149.5 ; 116,148.5 116,149.5
  Top Layer w1: L2.1 64.7,125.3 64.5,125.5 68.45,125.5 C5.1 v1(68.5,131) v1(70,131) v1(80.5,131) ; L1.1 64.7,140.8 65,140.5 65.05,140.55 C22.1 v1(68.5,134) ; v1(84.5,131) v1(90.5,131) v1(91.5,132) ; v1(99.5,134.5) v1(100.5,135.5) 100.5,141 104.5,145 109,145 111.5,147.5 ; v1(125,150) v1(126.5,150) v1(163,150) v1(164.5,150) ; v1(166.5,148) v1(167.5,147) 169.5,145 169.5,143.5 ; v1(169.5,135) v1(169.5,136.5) 169.5,143.5 ; v1(170.5,131.5) v1(171.5,130.5) C24.1 171.55,125.5 L4.1@175.3,125.5 ; L3.1 175.2,143.3 175,143.5 174.95,143.45 C23.1 169.55,143.45 169.5,143.5 ; L4.1@175.3,125.5 175.2,125.4 L4.1 175.3,124.1 L4.1@175.3,125.5
  Bottom Layer w1: v1(68.5,134) v1(68.5,131) v1(70,131) ; v1(79,131) v1(86,131) ; v1(90.5,131) v1(91.5,132) 97,132 v1(99.5,134.5) v1(100.5,135.5) ; v1(116,147.5) 117.5,149 ; v1(116,150.5) 117.5,149 ; v1(126.5,150) v1(125,150) 124,149 117.5,149 ; v1(163,150) v1(164.5,150) v1(166.5,148) v1(167.5,147) ; v1(169.5,136.5) v1(169.5,135) 169.5,132.5 v1(170.5,131.5) v1(171.5,130.5)
NetC6_1: C6.1 DA3.2 | length 11.1
  Top Layer w0.5: C6.1 158.5,130 159.865,131.365 DA3.2
NetC19_2: C19.2 DA2.4 VD19.3 VD20.3 | length 13.4
  Top Layer w0.25: DA2.4 107.15,135.35
  Top Layer w0.5: C19.2 v1(107,133.5) 108,134.5 ; 107.15,135.35 108,134.5 ; v1(108.5,131) 110.2,129.3 VD20.3 ; VD19.3 108,134.5
  Bottom Layer w0.5: v1(107,133.5) 107,132.5 v1(108.5,131)
NetDA1_2: DA1.2 R15.2 R16.1 | length 5.9
  Top Layer w0.25: R15.2 76.4,125.2 76.74,125.54 DA1.2
NetDA1_6: DA1.6 R17.2 R18.1 | length 5.9
  Top Layer w0.25: R17.2 76.5,120.8 76.84,120.46 DA1.6
NetDA1_9: DA1.9 R21.2 R22.1 | length 5.4
  Top Layer w0.25: DA1.9 86.96,120.46 87.3,120.8 90,120.8
NetDA1_13: DA1.13 R19.2 R20.1 | length 5.9
  Top Layer w0.25: DA1.13 86.96,125.54 87.3,125.2 R19.2
NetDA3_7: DA3.7 R23.2 | length 11.1
  Top Layer w0.25: v1(159.865,141.365) DA3.7 DA3.7@160,139.835 ; v1(164,135) R23.2
  Bottom Layer w0.25: v1(159.865,141.365) 159.865,140.635 164,136.5 v1(164,135)
NetL1_2: L1.2 VD10.1 VT1.2 | length 22.1
  Top Layer w1: VD10.1 39.5,145.5 40.7,144.3 VT1.2@44,144.3 ; VT1.2@44,150.7 VT1.2@44,144.3 ; L1.2 50.3,143.8 50.5,144 50.2,144.3 VT1.2@44,144.3
NetL2_2: L2.2 VD11.1 VT2.2 | length 22.1
  Top Layer w1: VD11.1 39.5,127.5 40.7,126.3 VT2.2@44,126.3 ; VT2.2@44,132.7 VT2.2@44,126.3 ; L2.2 50.3,126.2 50,126.5 49.8,126.3 VT2.2@44,126.3
NetL3_2: L3.2 VD12.1 VT3.2 | length 21.7
  Top Layer w1: L3.2 189.6,143.6 190.3,144.3 VT3.2@196,144.3 ; VT3.2@196,150.7 VT3.2@196,144.3 ; VD12.1 200.5,145.5 199.3,144.3 VT3.2@196,144.3
NetL4_2: L4.2 VD13.1 VT4.2 | length 23.4
  Top Layer w1: L4.2@189.5,127.5 L4.2@189.6,127.4 ; L4.2 L4.2@189.6,127.4 ; VT4.2@196,133.7 VT4.2@196,127.3 ; VD13.1 200.5,128.5 199.3,127.3 VT4.2@196,127.3 ; L4.2@189.6,127.4 189.7,127.3 VT4.2@196,127.3
NetR7_1: R7.1 VT17.3 | length 4
  Top Layer w0.25: VT17.3 182.1,158.8 R7.1
NetR8_1: R8.1 VT16.3 | length 4
  Top Layer w0.25: VT16.3 192.1,158.8 R8.1
NetR32_1: R32.1 R33.1 VT7.4 | length 5.8
  Top Layer w0.25: R33.1 R32.1 117.7,151.3 118.095,150.905 VT7.4
NetR39_2: R39.2 VD15.3 VT8.3 VT9.3 | length 11.2
  Top Layer w0.5: R39.2 50,149.2 50.5,148.7 VD15.3 VT8.3
NetR41_2: R41.2 VD16.3 VT10.3 VT11.3 | length 11.2
  Top Layer w0.5: R41.2 49.5,130.7 VD16.3 VT11.3 VT10.3
NetR43_2: R43.2 VD17.3 VT12.3 VT13.3 | length 11.2
  Top Layer w0.5: VT12.3 VT13.3 VD17.3 190.5,148.7 R43.2
NetR45_2: R45.2 VD18.3 VT14.3 VT15.3 | length 11.2
  Top Layer w0.5: VT14.3 VT15.3 VD18.3 190.5,130.7 R45.2
PWMCHARGE: DA3.3 DD1.26 | length 98.5
  Top Layer w0.25: DD1.26 86.25,149.25 87,150 91.5,150 95,146.5 95,139 95.813,138.187 96,138 96,134.5 98,132.5 98,131.5 103.5,126 156,126 161.135,131.135
  Top Layer w0.5: 161.135,131.135 DA3.3
PWMLEFT1: DD1.38 R38.2 VT8.1 VT9.1 | length 27.9
  Top Layer w0.25: VT9.1 56.9,151.9 57.5,152.5 61,152.5 ; VT8.1 60.9,152.4 61,152.5 ; DD1.38 75.75,146.25 71.5,150.5 63.3,150.5 R38.2 63,151.5 62,152.5 61,152.5
PWMLEFT2: DD1.39 R40.2 VT10.1 VT11.1 | length 40.4
  Top Layer w0.25: VT11.1 56.9,133.9 57.5,134.5 61,134.5 ; VT10.1 60.9,134.4 61,134.5 ; DD1.39 75.25,145.75 74,144.5 74,135.5 75,134.5 75,133 74,132 64.5,132 63.7,132.8 R40.2 62.2,132.8 62,133 62,134 61.5,134.5 61,134.5
PWMRIGHT1: DD1.22 R42.2 VT12.1 VT13.1 | length 131.5
  Top Layer w0.25: DD1.22 90.25,145.75 91.5,147 93.5,147 94.5,146 94.5,138.5 95.5,137.5 95.5,134 97.5,132 97.5,131 103,125.5 159,125.5 168,134.5 v1(168,144.5) ; v1(170,146.5) 173.5,146.5 176.2,149.2 R42.2 178.3,149.2 179.1,150 181,150 ; VT12.1 180.9,150.1 181,150 ; VT13.1 184.9,150.4 184.5,150 181,150
  Bottom Layer w0.25: v1(168,144.5) v1(170,146.5)
PWMRIGHT2: DD1.21 R44.2 VT14.1 VT15.1 | length 123
  Top Layer w0.25: DD1.21 90.75,145.25 92,146.5 93,146.5 94,145.5 94,138 95,137 95,133.5 97,131.5 97,126.5 99.5,124 162,124 165.5,127.5 v1(170,127.5) ; v1(173,127.5) 173,130 174.2,131.2 R44.2 178.2,131.2 179,132 180.9,132 ; VT14.1 180.9,132 ; VT15.1 184.9,132.4 184.5,132 180.9,132
  Bottom Layer w0.25: v1(170,127.5) v1(173,127.5)
PWR: C10.2 DA1.4 | length 7.2
  Top Layer w0.25: DA1.4@79.3,123 80.9,123 81.2,122.7 C10.2
RESET: DD1.7 X2.6 | length 40.9
  Top Layer w0.25: v1(75.5,143.5) 75,143 75,138.5 77,136.5 80.25,136.5 81.25,137.5 83,137.5 84.25,138.75 DD1.7 ; v1(75.5,148) 75,148 70,153 70,157 71,158 74.937,158 X2.6
  Bottom Layer w0.25: v1(75.5,143.5) v1(75.5,148)
SCL: DD1.45 R4.2 X3.2 X4.2 | length 254.1
  Top Layer w0.25: X3.2 27,141.5 27.5,142 27.5,153 29,154.5 65.5,154.5 v1(66,154) 66,152 67,151 68,151 69.5,152.5 69.5,157.5 70.5,158.5 76.5,158.5 80,155 v1(83.5,155) ; v1(68,149.5) 72,145.5 72,140.5 72.8,139.7 R4.2 72.8,138.7 73,138.5 v1(73,138) ; v1(78,140.5) 78,142 78.75,142.75 DD1.45 ; v1(88,153.5) 106.5,153.5 108.5,155.5 170,155.5 171,154.5 204.5,154.5 v1(205,155) ; v1(211,152) 212.5,152 213.5,151 213.5,143.5 215.5,141.5 X4.2
  Bottom Layer w0.25: v1(66,154) 66.5,153.5 66.5,151 v1(68,149.5) ; v1(73,138) 76.5,138 78,139.5 v1(78,140.5) ; v1(83.5,155) 85,153.5 v1(88,153.5) ; v1(205,155) 208,152 v1(211,152)
SDA: DD1.43 R5.2 X3.1 X4.1 | length 240.4
  Top Layer w0.25: X3.1 25.5,144 27,145.5 27,153.5 28.5,155 68.5,155 ; v1(68.5,153) 68.5,157.5 70,159 77.5,159 80.5,156 v1(84.5,156) ; v1(71,148.5) 73,146.5 v1(73,143) 72.8,142.8 R5.2 ; v1(76,141) 76.5,141.5 76.5,143 77.25,143.75 DD1.43 ; v1(89,154.5) 89.5,154 106,154 108,156 170.5,156 171.5,155 203.5,155 204.5,156 v1(206,156) ; v1(211,153.5) 211.707,153.5 214,151.207 214,145.5 215.5,144 X4.1
  Bottom Layer w0.25: v1(68.5,153) 71,150.5 v1(71,148.5) ; v1(73,143) 75,141 v1(76,141) ; v1(84.5,156) 86,154.5 v1(89,154.5) ; v1(206,156) 208.5,153.5 v1(211,153.5)
SHUNTLEFT1: DA1.3 R2.2 X3.6 | length 70.9
  Top Layer w0.25: R2.2 36.4,136.6 38,135 62.5,135 65,132.5 70.5,132.5 v1(71,133) ; v1(72,126.5) 72,125 72.73,124.27 DA1.3
  Top Layer w1: X3.6 28.5,131.5 32.5,135.5 32.5,138 33.5,139 R2.2
  Bottom Layer w0.25: v1(71,133) 72,132 v1(72,126.5)
SHUNTLEFT2: DA1.5 R3.2 X3.8 | length 63.1
  Top Layer w0.25: R3.2 36.4,117.7 37.6,116.5 67,116.5 72.23,121.73 DA1.5
  Top Layer w1: X3.8 28,126.5 30,124.5 30,123 32.5,120.5 R3.2
SHUNTRIGHT1: DA1.12 R6.2 X4.6 | length 142.4
  Top Layer w0.25: DA1.12 91.27,124.27 92,125 v1(96.2,125) ; v1(99.9,125) 100,125 100.5,124.5 161.5,124.5 172,135 189,135 190.5,136.5 197,136.5 197.5,136 203.5,136 204.6,137.1 R6.2
  Top Layer w1: R6.2 206,139 213.5,131.5 X4.6
  Bottom Layer w0.25: v1(96.2,125) v1(99.9,125)
SHUNTRIGHT2: DA1.10 R1.2 X4.8 | length 141.5
  Top Layer w0.25: DA1.10 91.73,121.73 93,123 150,123 156.5,116.5 201.5,116.5 204.5,119.5 R1.2@204.5,121.9
  Top Layer w0.5: R1.2@204.5,121.9 R1.2
  Top Layer w1: R1.2 209.5,122 210,122.5 210,125 211.5,126.5 X4.8
STRLEFT1+: C1.2 R24.2 VD10.2 X3.5 | length 32.5
  Top Layer w0.5: 30,142 R24.2
  Top Layer w1: X3.5 28.5,134 30,135.5 30,142 30,148 31,149 32.45,149 C1.2 34.85,148.95 35.4,149.5 VD10.2
STRLEFT2+: C2.2 R26.2 VD11.2 X3.7 | length 23.7
  Top Layer w0.5: 28.25,128.75 33.5,123.5 R26.2
  Top Layer w1: X3.7 28.5,129 30.5,131 32.45,131 C2.2 34.45,130.95 35,131.5 VD11.2
STRRIGHT1+: C3.2 R28.2 VD12.2 X4.5 | length 33
  Top Layer w0.5: R28.2 211,142 ; 210.95,142.8 211,142.75
  Top Layer w1: VD12.2 204.5,149.5 205.05,148.95 C3.2 207.55,149 210,149 211,148 211,142.75 211,142 211,136.5 213.5,134 X4.5
STRRIGHT2+: C4.2 R30.2 VD13.2 X4.7 | length 25.1
  Top Layer w0.5: R30.2 208,125 209.5,126.5 209.5,128.5 211.5,130.5
  Top Layer w1: VD13.2 204.5,132.5 205.05,131.95 C4.2 207.55,132 210,132 211.5,130.5 213,129 X4.7
SWDCLK: DD1.37 X2.3 | length 9.9
  Top Layer w0.25: X2.3 77,150.73 77,148.5 78.75,146.75 DD1.37
SWDIO: DD1.34 X2.4 | length 13
  Top Layer w0.25: X2.4 74.73,156.27 76,155 78,155 82.25,150.75 DD1.34
UBAT: DD1.19 R35.1 R36.2 | length 41.1
  Top Layer w0.25: DD1.19 92.75,144.25 93.5,143.5 93.5,137 v1(94,136.5) ; v1(97,136.5) 98,135.5 98,134.5 100,132.5 116,132.5 117,133.5 R36.2 118.2,135
  Bottom Layer w0.25: v1(94,136.5) v1(97,136.5)
ULEFT1: DD1.10 R24.1 R25.2 | length 59.9
  Top Layer w0.25: 39.8,142 39.8,137.5 41.8,135.5 63,135.5 65.5,133 69.5,133 70.5,134 72.5,134 v1(73.5,133) ; v1(78.5,134.5) 79.125,134.5 81.625,137 84,137 85.75,138.75 DD1.10
  Top Layer w0.5: R24.1 39.8,142 R25.2
  Bottom Layer w0.25: v1(73.5,133) 76.5,133 78,134.5 v1(78.5,134.5)
ULEFT2: DD1.11 R26.1 R27.2 | length 71.3
  Top Layer w0.25: 39.7,123.5 39.7,118.8 41.5,117 66.5,117 71,121.5 71,127 73,129 81,129 81.5,129.5 81.5,133.5 86.25,138.25 DD1.11
  Top Layer w0.5: R26.1 39.7,123.5 R27.2
URIGHT1: DD1.17 R28.1 R29.2 | length 139.3
  Top Layer w0.25: DD1.17 91.75,143.25 92.5,142.5 92.5,135 96,131.5 v1(96,130) ; v1(98,129) 98.5,129 102.5,125 161,125 171.5,135.5 188.5,135.5 190,137 197.5,137 198,136.5 200,136.5 201.5,138 201.5,142
  Top Layer w0.5: R29.2 R28.1
  Bottom Layer w0.25: v1(96,130) 97,130 v1(98,129)
URIGHT2: DD1.16 R30.1 R31.2 | length 140
  Top Layer w0.25: DD1.16 91.25,142.75 92,142 92,134.5 95,131.5 95,129.5 96.5,128 96.5,126 98,124.5 99,123.5 150.5,123.5 157,117 198,117 201.5,120.5 201.5,125
  Top Layer w0.5: R31.2 R30.1
USBD+: DD1.33 X1.3 | length 144
  Top Layer w0.25: DD1.33 82.75,152.75 86,156 90,156 91,155 105,155 107,157 171.5,157 172.5,156 202.5,156 204,157.5 205,157.5 206,158.5 206,161 v1(207,162) ; v1(210.5,163.5) 211,163.5 212,164.5 X1.3
  Bottom Layer w0.25: v1(207,162) 207.5,162.5 209.5,162.5 v1(210.5,163.5)
USBD-: DD1.32 X1.2 | length 143.8
  Top Layer w0.25: DD1.32 83.25,152.25 86.5,155.5 89.5,155.5 90.5,154.5 105.5,154.5 107.5,156.5 171,156.5 172,155.5 203,155.5 204.5,157 205.5,157 207,158.5 v1(207,160.5) ; v1(210.5,162) 212.65,164.15 X1.2
  Bottom Layer w0.25: v1(207,160.5) 208.5,162 v1(210.5,162)
UUSB: C20.1 DD1.40 R46.2 R47.1 | length 53.1
  Top Layer w0.25: DD1.40 75.75,145.25 74.5,144 74.5,136 77,133.5 v1(80.5,133.5) ; v1(87.5,133.5) 92,133.5 94.5,131 94.5,128.5 v1(95.5,127.5) ; v1(103,128) 104.2,128 ; R46.2 104.2,128 ; C20.1 R47.1 104.2,128
  Bottom Layer w0.25: v1(80.5,133.5) v1(87.5,133.5) ; v1(95.5,127.5) 96,127 102,127 v1(103,128)
pads on no net: DA2.1 DA2.3 DD1.2 DD1.3 DD1.4 DD1.5 DD1.6 DD1.25 DD1.41 DD1.42 DD1.46 VD15.2 VD16.2 VD17.2 VD18.2 VD19.2 VD20.2

## Polygon pours and split planes (outlines as drawn)
GND on Bottom Layer "Signal Layer 1-No Net" (solid, pour order 2): 23.5,116.5 23.5,159.5 156.5,159.5 156.5,163.5 198.5,163.5 198.5,170.5 217.5,170.5 217.5,116.5 146.5,116.5 146.5,123 94.5,123 94.5,116.5
+3.3V on Top Layer "Signal Layer 1-No Net" (solid, pour order 3): 80.5,147.5 87.5,147.5 87.5,140.75 87.375,140.625 87.25,140.5 80.5,140.5

## Keep-outs
Keep-Out Layer:
  lines w0: 158,164 198,164
  lines w0.1: 158,164 ccw(c158,162) 156,162 156,160 25,160 ccw(c25,158) 23,158 23,118 ccw(c25,118) 25,116 93,116 ccw(c93,118) 95,118 95,122.5 146,122.5 146,118 ccw(c148,118) 148,116 216,116 ccw(c216,118) 218,118 218,159.5 218,169 ccw(c216,169) 216,171 200,171 ccw(c200,169) 198,169 198,164

## Text inside footprints (layer, text, board x,y; h text height)
X3: Mechanical 1 "4" at 24.5,136 h2; Mechanical 1 "3" at 24.5,138.5 h2; Mechanical 1 "2" at 24.5,141 h2; Mechanical 1 "1" at 24.5,143.5 h2; Mechanical 1 "5" at 24.5,133.5 h2; Mechanical 1 "6" at 24.5,131 h2; Mechanical 1 "7" at 24.5,128.5 h2; Mechanical 1 "8" at 24.5,126 h2
X4: Mechanical 1 "4" at 215.5,136 h2; Mechanical 1 "3" at 215.5,138.5 h2; Mechanical 1 "2" at 215.5,141 h2; Mechanical 1 "1" at 215.5,143.5 h2; Mechanical 1 "5" at 215.5,133.5 h2; Mechanical 1 "6" at 215.5,131 h2; Mechanical 1 "7" at 215.5,128.5 h2; Mechanical 1 "8" at 215.5,126 h2